# Altium PCB xmega32A4U.PcbDoc
Units mil, origin at the board's own origin, x right, y up, seen from the top; angles counter-clockwise.
Board outline 1995 x 770 mil, 2 copper layers (Top, Bottom), stack 61.811 mil thick; 23 components, 45 nets, 137 pads, 40 vias.
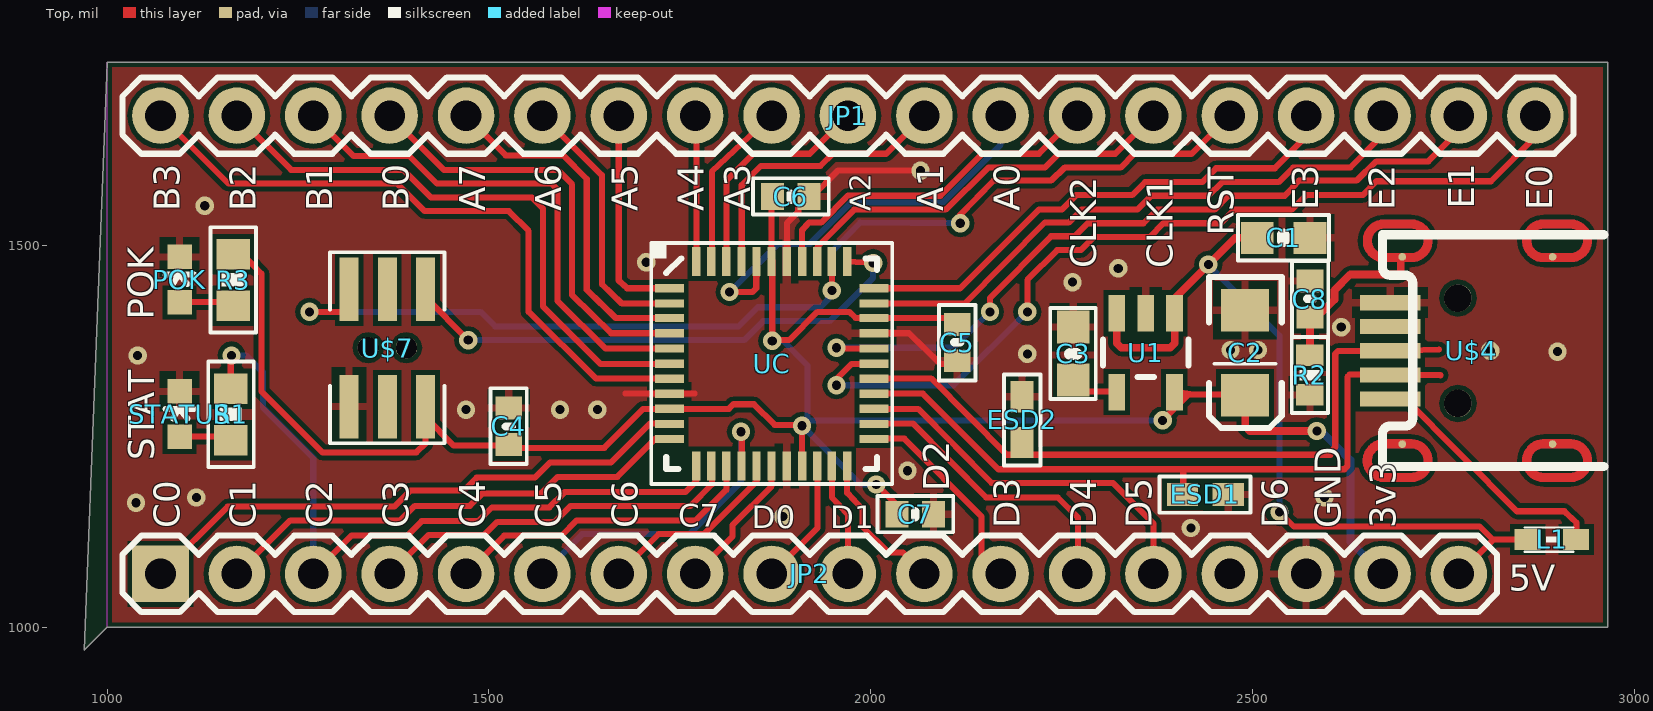
[diagram p0: Top view]
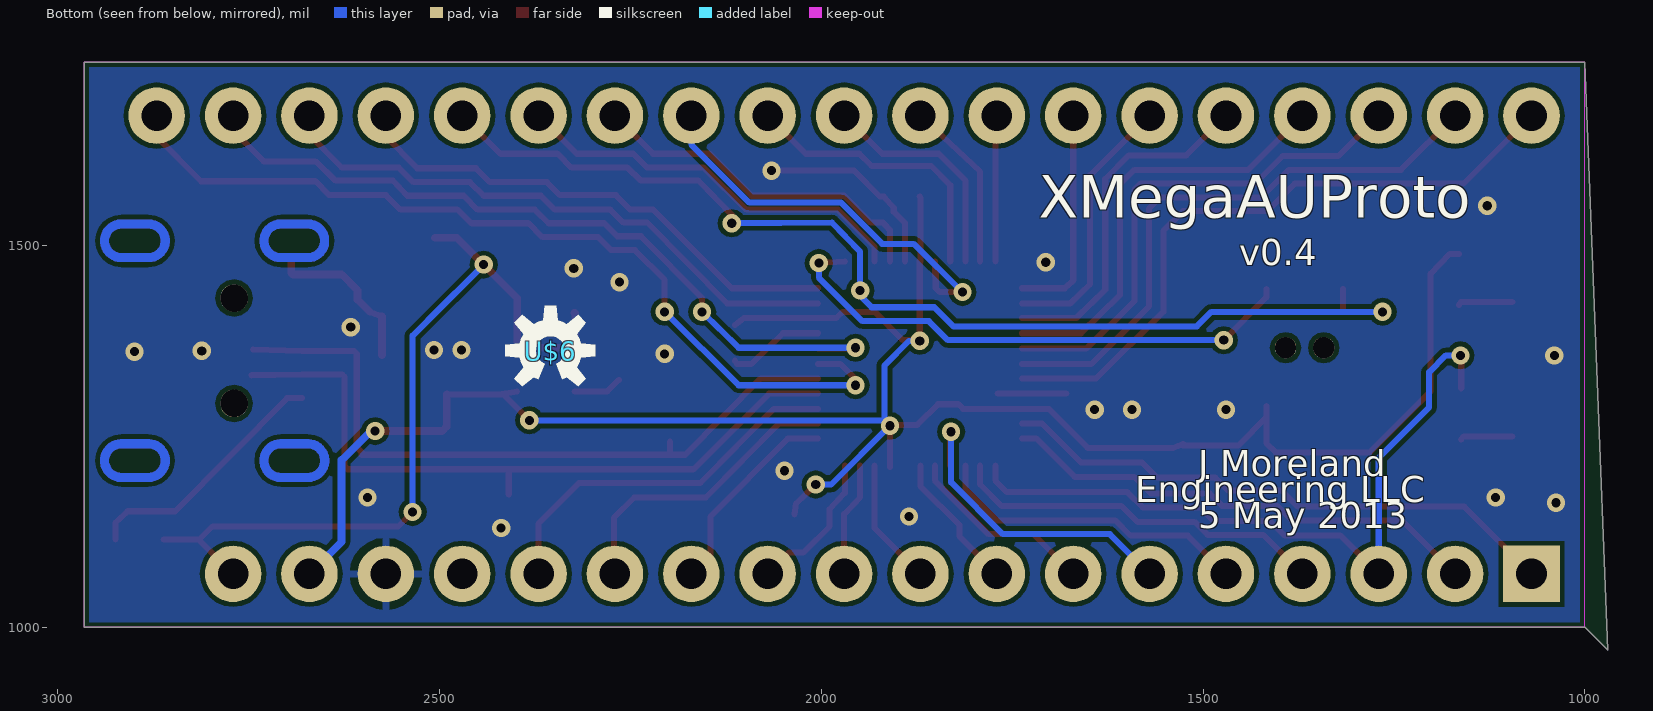
[diagram p1: Bottom view, seen from below]

## Layer stack, top to bottom
Top Solder: solder mask 0.4, Solder Resist, Dk 3.5
Top: signal copper 1.378
Dielectric 1: core 59.0551, FR-4, Dk 4.8
Bottom: signal copper 1.378
Bottom Solder: solder mask 0.4, Solder Resist, Dk 3.5

## Board outline
1000,1000 2965,1000 2965,1740 1000,1740 970,970

## Design rules (kind name [scope] priority, off if disabled: settings)
Clearance mdViaVia [IsVia vs IsVia] p1: gap=6
Clearance mdPadVia [IsPad vs IsVia] p2: gap=6
Clearance mdPadPad [IsPad vs IsPad] p3: gap=6
Clearance mdWireVia [(InLayerClass('Signal Layers') AND IsTrack) vs IsVia] p4: gap=6
Clearance mdWirePad [(InLayerClass('Signal Layers') AND IsTrack) vs IsPad] p5: gap=6
Clearance mdWireWire [(InLayerClass('Signal Layers') AND IsTrack) vs (InLayerClass('Signal Layers') AND IsTrack)] p6: gap=6
Clearance [All] p7: gap=6
HoleSize [All] p1: absolutevalues=TRUE maxlimit=100000 minlimit=12 maxpercent=80.000 minpercent=20.000
HoleToHoleClearance [All] p1: gap=8 allowstackedmicrovias=TRUE
PasteMaskExpansion [All] p1: expansion=2
PolygonConnect ThermalVias [IsVia] p1: connectstyle=Direct reliefconductorwidth=10 reliefentries=4 polygonreliefangle="90 Angle" airgapwidth=10
PolygonConnect [All] p2: connectstyle=Relief reliefconductorwidth=10 reliefentries=4 polygonreliefangle="90 Angle" airgapwidth=10
RoutingVias [All] p1: holewidth=28 width=50 viastyle="Through Hole" minholewidth=28 minwidth=50 maxholewidth=28 maxwidth=50
SilkToSilkClearance [All] p1 off: silktosilkclearance=10
SilkToSolderMaskClearance [IsPad] p1 off: minsilkscreentomaskgap=10 clearancetoexposedcopper=TRUE
SolderMaskExpansion [All] p1: expansion=2
Width [All] p1: maxlimit=100000 minlimit=6 preferedwidth=10
24 further rules are at their usual default settings.

## Components (designator, comment, footprint, x,y, rotation, side; value= is the part's Value field where it differs from the comment)
C1 "1uF" 0603-CAP 2540,1510 r0 top
C2 "10uF" EIA3216 2490,1360 r270 top
C3 "470pF" 0603-CAP 2265,1358 r90 top
C4 "0.1uF" 0402-CAP 1526,1263 r90 top
C5 "0.1uF" 0402-CAP 2113,1373 r270 top
C6 "0.1uF" 0402-CAP 1895,1564 r0 top
C7 "0.1uF" 0402-CAP 2058,1148 r0 top
C8 "4.7nF" 0402-CAP 2575,1430 r270 top
ESD1 "" 0603-CHIPGUARD 2438,1174 r180 top
ESD2 "" 0603-CHIPGUARD 2198,1272 r270 top
JP1 "" 1X19 1070,1670 r0 top
JP2 "" 1X18 1070,1070 r0 top
L1 "220 Ohm" 0603 2888,1115 r180 top
POK "Green" LED-0603 1095,1455 r0 top
R1 "1k" 0603-RES 1162,1279 r270 top
R2 "1M" 0402-RES 2575,1330 r90 top
R3 "1k" 0603-RES 1165,1455 r270 top
STATUS "Blue" LED-0603 1095,1279 r0 top
U1 "" SOT23-5 2360,1360 r180 top
U$4 "USB-MINIB" USB-MINI-B-UX60-MB-5S8 2680,1362 r90 top
U$6 "" OSHW-LOGO-S 2355,1362 r180 bottom
U$7 "" AVR_50MIL_PROG 1367,1366 r270 top
UC "XMEGA-A4UVQFN-NP" QFN44-NOPAD 1870,1345 r0 top

## Footprints (in the part's own frame and the unit in brackets; to place one, negate y for a bottom-side part, rotate by r counter-clockwise, add the part's x,y. Pads: shape width x height; smd on the part's side, far side on the other; paste and mask are expansions set on the pad)
1X18 [mil] "1X18"
  rect 74x74 hole 40: 1(0,0)
  round 74 hole 40: 2(100,0) 3(200,0) 4(300,0) 5(400,0) 6(500,0) 7(600,0) 8(700,0) 9(800,0) 10(900,0) 11(1000,0) 12(1100,0) 13(1200,0) 14(1300,0) 15(1400,0) 16(1500,0) 17(1600,0) 18(1700,0)
  silkscreen extent -50,-50 1750,50
1X19 [mil] "1X19"
  round 74 hole 40: 1(0,0) 2(100,0) 3(200,0) 4(300,0) 5(400,0) 6(500,0) 7(600,0) 8(700,0) 9(800,0) 10(900,0) 11(1000,0) 12(1100,0) 13(1200,0) 14(1300,0) 15(1400,0) 16(1500,0) 17(1600,0) 18(1700,0) 19(1800,0)
  silkscreen extent -50,-50 1850,50
0402-CAP [mil] "0402-CAP"
  rect 30x35 smd: 1(-23.62,0) 2(24,0)
  silkscreen extent -49,-24 50,24
0402-RES [mil] "0402-RES"
  rect 28x36 smd: 1(-25.59,0) 2(26,0)
  silkscreen extent -49,-24 50,24
0603 [mil] "0603"
  rect 34x28 smd: 1(-35.43,0) 2(28,0)
  silkscreen extent -31,-16 32,16
0603-CAP [mil] "0603-CAP"
  rect 43x42 smd: 1(-34.06,0) 2(35,0)
  silkscreen extent -59,-30 60,30
0603-CHIPGUARD [mil] "0603-CHIPGUARD"
  rect 41x30 smd: P$1(-29.92,0) P$2(30,0)
  silkscreen extent -59,-24 60,24
0603-RES [mil] "0603-RES"
  rect 40x44 smd: 1(-33.46,0) 2(34,0)
  silkscreen extent -69,-30 69,30
AVR_50MIL_PROG [mil] "AVR_50MIL_PROG"
  rect 83x25 smd: 1(-76.5,50) 2(77,50) 3(-76.5,0) 4(77,0) 5(-76.5,-50) 6(77,-50)
  round 28 hole 28: 1(0,25) 1(0,-25)
  silkscreen extent -125,-75 125,75
EIA3216 [mil] "EIA3216"
  rect 56x63 smd: A(56,0) C(-55.12,0)
  silkscreen extent -98,-47 99,48
LED-0603 [mil] "LED-0603"
  rect 32x32 smd: A(0,-29.53) C(0,30)
  silkscreen extent -18,-6 19,7
OSHW-LOGO-S [mil] "OSHW-LOGO-S"
  silkscreen extent -59,-47 59,59
QFN44-NOPAD [mil] "QFN44-NOPAD"
  rect 38x11 smd: 1(-133.86,99) 2(-133.86,79) 3(-133.86,60) 4(-133.86,40) 5(-133.86,20) 6(-133.86,0) 7(-133.86,-19.68) 8(-133.86,-39.37) 9(-133.86,-59.06) 10(-133.86,-78.74) 11(-133.86,-98.43) 23(134,-98.43) 24(134,-78.74) 25(134,-59.06) 26(134,-39.37) 27(134,-19.68) 28(134,0) 29(134,20) 30(134,40) 31(134,60) 32(134,79) 33(134,99)
  rect 11x38 smd: 12(-98.43,-133.86) 13(-78.74,-133.86) 14(-59.06,-133.86) 15(-39.37,-133.86) 16(-19.68,-133.86) 17(0,-133.86) 18(20,-133.86) 19(40,-133.86) 20(60,-133.86) 21(79,-133.86) 22(99,-133.86) 34(99,134) 35(79,134) 36(60,134) 37(40,134) 38(20,134) 39(0,134) 40(-19.68,134) 41(-39.37,134) 42(-59.06,134) 43(-78.74,134) 44(-98.43,134)
  silkscreen extent -157,-157 158,158
SOT23-5 [mil] "SOT23-5"
  rect 22x48 smd: 1(-37.4,-51.18) 2(0,-51.18) 3(38,-51.18) 4(38,52) 5(-37.4,52)
  silkscreen extent -56,-17 56,32
USB-MINI-B-UX60-MB-5S8 [mil] "USB-MINI-B-UX60-MB-5S8"
  round 36 hole 36: 1(-68.9,-88.58) 1(69,-88.58)
  rect 20x79 smd: D+(0,0) D-(-31.5,0) GND(63,0) ID(32,0) VBUS(-62.99,0)
  rrect100% 10x10 smd: SHLD1(-122.05,-15.75) SHLD2(123,-15.75) SHLD3(123,-212.6) SHLD4(-122.05,-212.6)
  Top lines w12: -165.75,8 cw(c-143.7,8) -121.65,8 -121.65,-27.56 cw(c-143.7,-27.56) -165.75,-27.56 -165.75,8 ; 122,8 cw(c144,8) 166,8 166,-27.56 cw(c144,-27.56) 122,-27.56 122,8 ; -165.75,-200.79 cw(c-143.7,-200.79) -121.65,-200.79 -121.65,-236.22 cw(c-143.7,-236.22) -165.75,-236.22 -165.75,-200.79 ; 122,-200.79 cw(c144,-200.79) 166,-200.79 166,-236.22 cw(c144,-236.22) 122,-236.22 122,-200.79
  Bottom lines w12: -165.75,8 cw(c-143.7,8) -121.65,8 -121.65,-27.56 cw(c-143.7,-27.56) -165.75,-27.56 -165.75,8 ; 122,8 cw(c144,8) 166,8 166,-27.56 cw(c144,-27.56) 122,-27.56 122,8 ; -165.75,-200.79 cw(c-143.7,-200.79) -121.65,-200.79 -121.65,-236.22 cw(c-143.7,-236.22) -165.75,-236.22 -165.75,-200.79 ; 122,-200.79 cw(c144,-200.79) 166,-200.79 166,-236.22 cw(c144,-236.22) 122,-236.22 122,-200.79
  silkscreen extent -152,-280 152,10

## Part data
C1 C3: library part 0603-CAP
C2: library part EIA3216
C4 C5 C6 C7 C8: library part 0402-CAP
ESD1 ESD2: library part 0603-CHIPGUARD
JP1: library part 1X19
JP2: library part 1X18
L1: library part 0603
POK STATUS: library part LED-0603
R1 R3: library part 0603-RES
R2: library part 0402-RES
U1: library part SOT23-5
U$4: library part USB-MINI-B-UX60-MB-5S8
U$6: library part OSHW-LOGO-S
U$7: library part AVR_50MIL_PROG
UC: library part QFN44-NOPAD

## Via types
v1: diameter 24/24 (per signal layer), hole 12, Top to Bottom, 40 vias

## Nets (pads, with @x,y where several pads share a name; then routed paths per layer and width w, separated by ;. In a path a pad name is that pad's centre, name@x,y a point inside that pad or via, vN(x,y) a via of type N, cw(c..) or ccw(c..) an arc to the next point about the centre after c; other vN are vias at no path point)
3.3V: C2.A C4.1 C5.1 C6.1 C7.1 JP2.17 R3.1 U1.5 U$7.2 UC.9 UC.19 UC.31 UC.39 | length 2875.8
  Top w8: R3.1@1165,1489 1177,1489 1202,1463 1202,1309 1282,1229 1405,1229 1417,1241 1417,1290 1417,1275 1454,1238 1526,1238 1526,1240 1539,1235 1651,1235 1702,1286 1737,1286 1814,1286 1820,1292 1847,1292 1874,1265 1909,1265 v1(1910,1264) 1910,1210 UC.19@1910,1212 ; C6.1@1871,1564 1870,1563 UC.39 1871,1480 v1(1871,1375) 1872,1376 1893,1376 1930,1413 1972,1413 1980,1405 2005,1405 UC.31 2101,1405 C5.1@2113,1396 ; v1(2007,1187) 2033,1162 C7.1@2035,1148 ; v1(2382,1271) 2416,1305 2422,1305 ; U1.5@2398,1309 2422,1305 ; C2.A@2490,1305 2422,1305
  Top w10: C2.A@2490,1305 2490,1263 2496,1257 v1(2584,1257)
  Bottom w8: v1(1871,1375) 1885,1375 1917,1343 v1@1917,1271 ; v1(2007,1187) 1987,1187 v1(1910,1264) v1@1917,1271 ; v1(2382,1271) v1@1917,1271
  Bottom w10: v1(2584,1257) 2590,1257 2628,1219 2628,1112 JP2.17
5V: L1.1 U$4.VBUS | length 333.5
  Top w8: U$4.VBUS@2680,1300 2699,1300 2846,1152 2908,1152 2924,1137 L1.1@2924,1115
5VINT: C1.1 JP2.18 L1.2 U1.1 U1.3 | length 1192
  Top w8: C1.1@2505,1510 C1.1@2506,1510 ; v1(2535,1151) 2554,1132 2797,1132 2814,1115 ; JP2.18 2814,1114 2814,1115 ; L1.2@2861,1115 2814,1115
  Top w10: U1.3@2323,1412 2322,1411 2322,1372 2328,1366 2392,1366 2398,1372 2398,1412 2398,1431 v1(2442,1475) 2477,1510 C1.1@2506,1510
  Bottom w8: 2515,1402 v1(2442,1475) 2535,1382 v1(2535,1151)
CLK1: JP1.14 UC.36 | length 530.3
  Top w8: UC.36 1930,1498 1978,1547 2098,1547 2154,1602 2228,1602 2246,1620 2320,1620 JP1.14
CLK2: JP1.13 UC.37 | length 463.4
  Top w8: UC.37 1910,1520 1919,1530 1935,1530 1970,1565 2091,1565 2146,1620 2220,1620 JP1.13
GND: C1.2 C2.C C3.2 C4.2 C5.2 C6.2 C7.2 C8.1 ESD1.P$1 ESD2.P$1 JP2.16 POK.C R2.1 STATUS.C U1.2 U$4.GND U$7.6 UC.8 UC.18 UC.30 UC.38 | length 474.4
  Top w8: 1679,1306 1736.14,1306 1737,1306 1769,1306 ; UC.38 1890,1529 1905,1544 1905,1549 1918,1564 C6.2 1923,1564 1957,1598 v1(2065,1598) ; UC.30 2050,1385 2091,1345 2110,1345 C5.2
  other v1: 2419,1130 1885,1145 1038,1163 1117,1170 2594,1170 2048,1205 1470,1285 1593,1285 1642,1285 1040,1356 2205,1358 2899,1361 2811,1362 2471,1363 2507,1363 2616,1393 2264,1452 2324,1470 1706,1478 1128,1552
N$1: POK.A R3.2 | length 72
  Top w8: POK.A@1095,1426 1162,1426 R3.2@1165,1422
N$2: R1.2 STATUS.A | length 69
  Top w8: STATUS.A@1095,1250 1159,1250 R1.2@1162,1246
N$3: C3.1 U1.4 | length 64.2
  Top w8: C3.1@2265,1324 2280,1309 U1.4@2323,1309
PA0: JP1.12 UC.40 | length 559.1
  Top w8: v1(1815,1439) 1845,1439 1850,1444 1850,1473 UC.40@1851,1474 ; UC.40@1851,1460 UC.40@1851,1474 ; UC.40@1851,1479 UC.40@1851,1474
  Bottom w8: v1(1815,1439) 1879,1502 1920,1502 1974,1556 2094,1556 2170,1632 JP1.12
PA1: JP1.11 UC.41 | length 376.7
  Top w8: UC.41@1831,1479 1831,1579 1856,1604 1934,1604 1950,1620 2020,1620 JP1.11
PA2: JP1.10 UC.42 | length 300.2
  Top w8: UC.42@1811,1479 1811,1585 1846,1620 1920,1620 JP1.10
PA3: JP1.9 UC.43 | length 224.8
  Top w8: UC.43@1792,1479 1792,1597 JP1.9
PA4: JP1.8 UC.44 | length 191.3
  Top w8: JP1.8 1772,1664 UC.44@1772,1479
PA5: JP1.7 UC.1 | length 286.9
  Top w8: JP1.7 1670,1454 1681,1444 UC.1@1737,1444
PA6: JP1.6 UC.2 | length 352.4
  Top w8: JP1.6 1648,1592 1648,1449 1674,1424 UC.2@1737,1424
PA7: JP1.5 UC.3 | length 461.4
  Top w8: JP1.5 1522,1618 1597,1618 1628,1587 1628,1442 1666,1405 UC.3@1737,1405
PB0: JP1.4 UC.4 | length 569.7
  Top w8: JP1.4 1441,1599 1590,1599 1609,1580 1609,1435 1660,1385 UC.4@1737,1385
PB1: JP1.3 UC.5 | length 678.6
  Top w8: JP1.3 1323,1617 1396,1617 1432,1581 1582,1581 1590,1573 1590,1427 1653,1365 UC.5@1737,1365
PB2: JP1.2 UC.6 | length 776.6
  Top w8: JP1.2 1241,1599 1388,1599 1424,1563 1556,1563 1571,1548 1571,1420 1646,1345 UC.6@1737,1345
PB3: JP1.1 UC.7 | length 871.3
  Top w8: JP1.1 1159,1581 1380,1581 1416,1545 1526,1545 1552,1519 1552,1413 1640,1326 UC.7@1737,1326
PC0: JP2.1 UC.10 | length 748.6
  Top w8: JP2.1 1158,1158 1376,1158 1397,1179 1467,1179 1484,1196 1560,1196 1580,1216 1660,1216 1711,1267 UC.10@1737,1267
PC1: JP2.2 UC.11 | length 640.3
  Top w8: JP2.2 1240,1140 1384,1140 1403,1159 1475,1159 1491,1175 1568,1175 1590,1197 1668,1197 1718,1247 UC.11@1737,1247
PC2: JP2.3 R1.1 UC.12 | length 957.4
  Top w8: R1.1@1162,1313 1162,1355 v1(1163,1356) ; JP2.3 1320,1120 1393,1120 1412,1139 1486,1139 1504,1157 1579,1157 1599,1177 1757,1177 1772,1192 UC.12@1772,1212
  Bottom w8: v1(1163,1356) 1182,1356 1204,1334 1204,1288 1270,1222 JP2.3
PC3: JP2.4 UC.13 | length 495.5
  Top w8: JP2.4 1421,1121 1494,1121 1511,1138 1586,1138 1607,1159 1764,1159 1792,1187 UC.13@1792,1212
PC4: JP2.5 UC.14 | length 418.6
  Top w8: JP2.5 1520,1120 1595,1120 1615,1140 1771,1140 1811,1180 UC.14@1811,1212
PC5: JP2.6 UC.15 | length 420.7
  Top w8: v1(1830,1256) 1831,1256 UC.15@1831,1212
  Bottom w8: JP2.6 1622,1122 1762,1122 1830,1190 v1(1830,1256)
PC6: JP2.7 UC.16 | length 251.5
  Top w8: JP2.7 1722,1122 1781,1122 1851,1192 UC.16@1851,1212
PC7: JP2.8 UC.17 | length 183.4
  Top w8: JP2.8 1819,1119 1819,1134 1870,1185 UC.17@1870,1212
PD0: JP2.9 UC.20 | length 166.9
  Top w8: JP2.9 1930,1130 UC.20@1930,1212
PD1: JP2.10 UC.21 | length 150.4
  Top w8: UC.21@1949,1212 1949,1170 1970,1148 JP2.10
PD2: JP2.11 UC.22 | length 194.7
  Top w8: UC.22@1969,1212 1969,1176 1989,1155 1989,1132 2023,1098 2042,1098 JP2.11
PD3: JP2.12 UC.23 | length 268.9
  Top w8: UC.23@2004,1247 2044,1247 2145,1145 2145,1095 JP2.12
PD4: JP2.13 UC.24 | length 392.7
  Top w8: UC.24@2004,1267 2055,1267 2151,1170 2245,1170 2271,1144 2271,1071 JP2.13
PD5: JP2.14 UC.25 | length 494.4
  Top w8: UC.25@2004,1286 2062,1286 2158,1189 2317,1189 2370,1136 JP2.14
PD6: JP2.15
PD6/D-: ESD1.P$2 U$4.D- UC.26 | length 936.9
  Top w8: UC.26@2004,1306 2068,1306 2167,1207 2408,1207 ; ESD1.P$2@2409,1174 2409,1207 2408,1207 ; 2746,1330 2680,1331 2627,1331 2624,1328 2624,1211 2620,1207 2408,1207
PD7/D+: ESD2.P$2 U$4.D+ UC.27 | length 930.5
  Top w8: UC.27@2004,1326 2079,1326 2178,1226 ESD2.P$2@2198,1226 ; ESD2.P$2@2198,1243 ESD2.P$2@2198,1226 ; 2602,1226 2598,1226 ; 2744,1364 U$4.D+ 2612,1362 2608,1358 2608,1236 2598,1226 ; ESD2.P$2@2198,1226 2598,1226
PDI-DATA: U$7.1@1417,1442.5 UC.34 | length 707.2
  Top w8: U$7.1@1417,1443 1417,1432 v1(1473,1376) ; UC.34 v1(2003,1477)
  Bottom w8: v1(1473,1376) 1834,1376 1859,1401 1946,1401 2003,1458 v1(2003,1477)
PE0: JP1.19 UC.28 | length 1167.2
  Top w8: v1(1955,1317) 1955,1325 1975,1345 UC.28 ; v1(2205,1413) 2205,1455 2244,1494 2275,1494 2292,1511 2365,1511 2383,1529 2458,1529 2476,1547 2551,1547 2570,1566 2644,1566 2662,1584 2812,1584 2870,1642 JP1.19
  Bottom w8: v1(1955,1317) 2108,1317 v1(2205,1413)
PE1: JP1.18 UC.29 | length 1012.6
  Top w8: v1(1955,1366) 1956,1365 UC.29 ; v1(2156,1413) 2156,1431 2236,1512 2267,1512 2284,1529 2357,1529 2375,1547 2450,1547 2468,1565 2542,1565 2561,1585 2636,1585 2662,1610 2730,1610 2770,1650 JP1.18
  Bottom w8: v1(1955,1366) 2108,1366 v1(2156,1413)
PE2: JP1.17 UC.32 | length 783.1
  Top w8: UC.32 2123,1424 2228,1530 2259,1530 2276,1547 2349,1547 2367,1565 2442,1565 2460,1583 2534,1583 2553,1602 2628,1602 2670,1645 JP1.17
PE3: JP1.16 UC.33 | length 675.7
  Top w8: UC.33 2117,1444 2220,1547 2250,1547 2269,1566 2342,1566 2359,1583 2434,1583 2452,1601 2529,1601 2570,1643 JP1.16
RST: JP1.15 U$7.5 UC.35 | length 1494.2
  Top w8: v1(1265,1413) 1316,1413 1317,1414 1317,1443 U$7.5@1317,1438 ; v1(1949,1441) UC.35 ; v1(2117,1529) 2116,1539 2161,1585 2236,1585 2254,1602 2327,1602 2345,1620 2420,1620 JP1.15
  Bottom w8: v1(1265,1413) 1489,1413 1508,1394 1827,1394 1852,1419 1934,1419 1949,1434 v1(1949,1441) ; v1(2117,1529) 1986,1530 1949,1492 v1@1949,1442 ; v1(1949,1441) v1@1949,1442 ; v1(1949,1441) v1@1949,1442
SHLD: C8.2 R2.2 U$4.SHLD1 U$4.SHLD2 U$4.SHLD3 U$4.SHLD4 | length 221.1
  Top w8: C8.2@2575,1407 C8.2@2591,1413
  Top w10: R2.2 C8.2@2575,1407 ; C8.2@2591,1413 2607,1429 2607,1441 2628,1462 2692,1462 2694,1464 2694,1483 U$4.SHLD2@2696,1485
pads on no net: U$4.1 U$4.ID U$7.1@1342,1366 U$7.1@1392,1366 U$7.3 U$7.4

## Polygon pours and split planes (outlines as drawn)
GND on Top "Top-GND" (solid, remove dead copper, pour order 2): 997,1743 2968,1743 2968,997 997,997
GND on Bottom "Bottom-GND" (solid, remove dead copper, pour order 4): 916,1754 3044,1754 3044,966 916,966

## Keep-outs
Keep-Out Layer:
  lines w0: 1000,1000 2965,1000 2965,1740 1000,1740 1000,1000

## Silkscreen, mask and mechanical layers (free items; w line width, h text height)
Top Overlay:
  text "E1" at 2790,1548 h34 r90
  text "E3" at 2586,1546 h34 r90
  text "E2" at 2686,1546 h34 r90
  text "E0" at 2892,1546 h34 r90
  text "B3" at 1095,1545 h34 r90
  text "B2" at 1195,1545 h34 r90
  text "B1" at 1295,1545 h34 r90
  text "B0" at 1395,1545 h34 r90
  text "A7" at 1495,1545 h34 r90
  text "A6" at 1595,1545 h34 r90
  text "A5" at 1695,1545 h34 r90
  text "A4" at 1781,1545 h34 r90
  text "A3" at 1842,1545 h34 r90
  text "A2" at 2000,1545 h27.2 r90
  text "A1" at 2095,1545 h34 r90
  text "A0" at 2195,1545 h34 r90
  text "RST" at 2475,1513 h34 r90
  text "CLK2" at 2295,1470 h34 r90
  text "CLK1" at 2395,1470 h34 r90
  text "POK" at 1061,1403 h34 r90
  text "STAT" at 1062,1218.59 h34 r90
  text "D2" at 2103,1178 h34 r90
  text "C7" at 1748,1132 h29.75
  text "C0" at 1095,1130 h34 r90
  text "C1" at 1195,1130 h34 r90
  text "C2" at 1295,1130 h34 r90
  text "C3" at 1395,1130 h34 r90
  text "C4" at 1495,1130 h34 r90
  text "C5" at 1595,1130 h34 r90
  text "C6" at 1695,1130 h34 r90
  text "D0" at 1844,1130 h29.75
  text "D1" at 1947,1130 h29.75
  text "D3" at 2195,1130 h34 r90
  text "D4" at 2295,1130 h34 r90
  text "D5" at 2368,1130 h34 r90
  text "D6" at 2546,1130 h34 r90
  text "GND" at 2615,1130 h34 r90
  text "3v3" at 2687,1130 h34 r90
  text "5V" at 2835,1048 h34
Bottom Overlay:
  text "XMegaAUProto" at 1714.87,1536 h55.25
  text "v0.4" at 1452.58,1474 h34
  text "J Moreland" at 1506.55,1198 h34
  text "Engineering LLC" at 1588.69,1164 h34
  text "5 May 2013" at 1506.55,1130 h34
Dimension:
  lines w0: 1000,1000 2965,1000 2965,1740 1000,1740 1000,1000
Unrouted:
  lines w0: 2575,1356 2696,1240 2893,1240 ; 2696,1485 2893,1485